# EAGLE board TSA_APS (EAGLE 9.7.0)
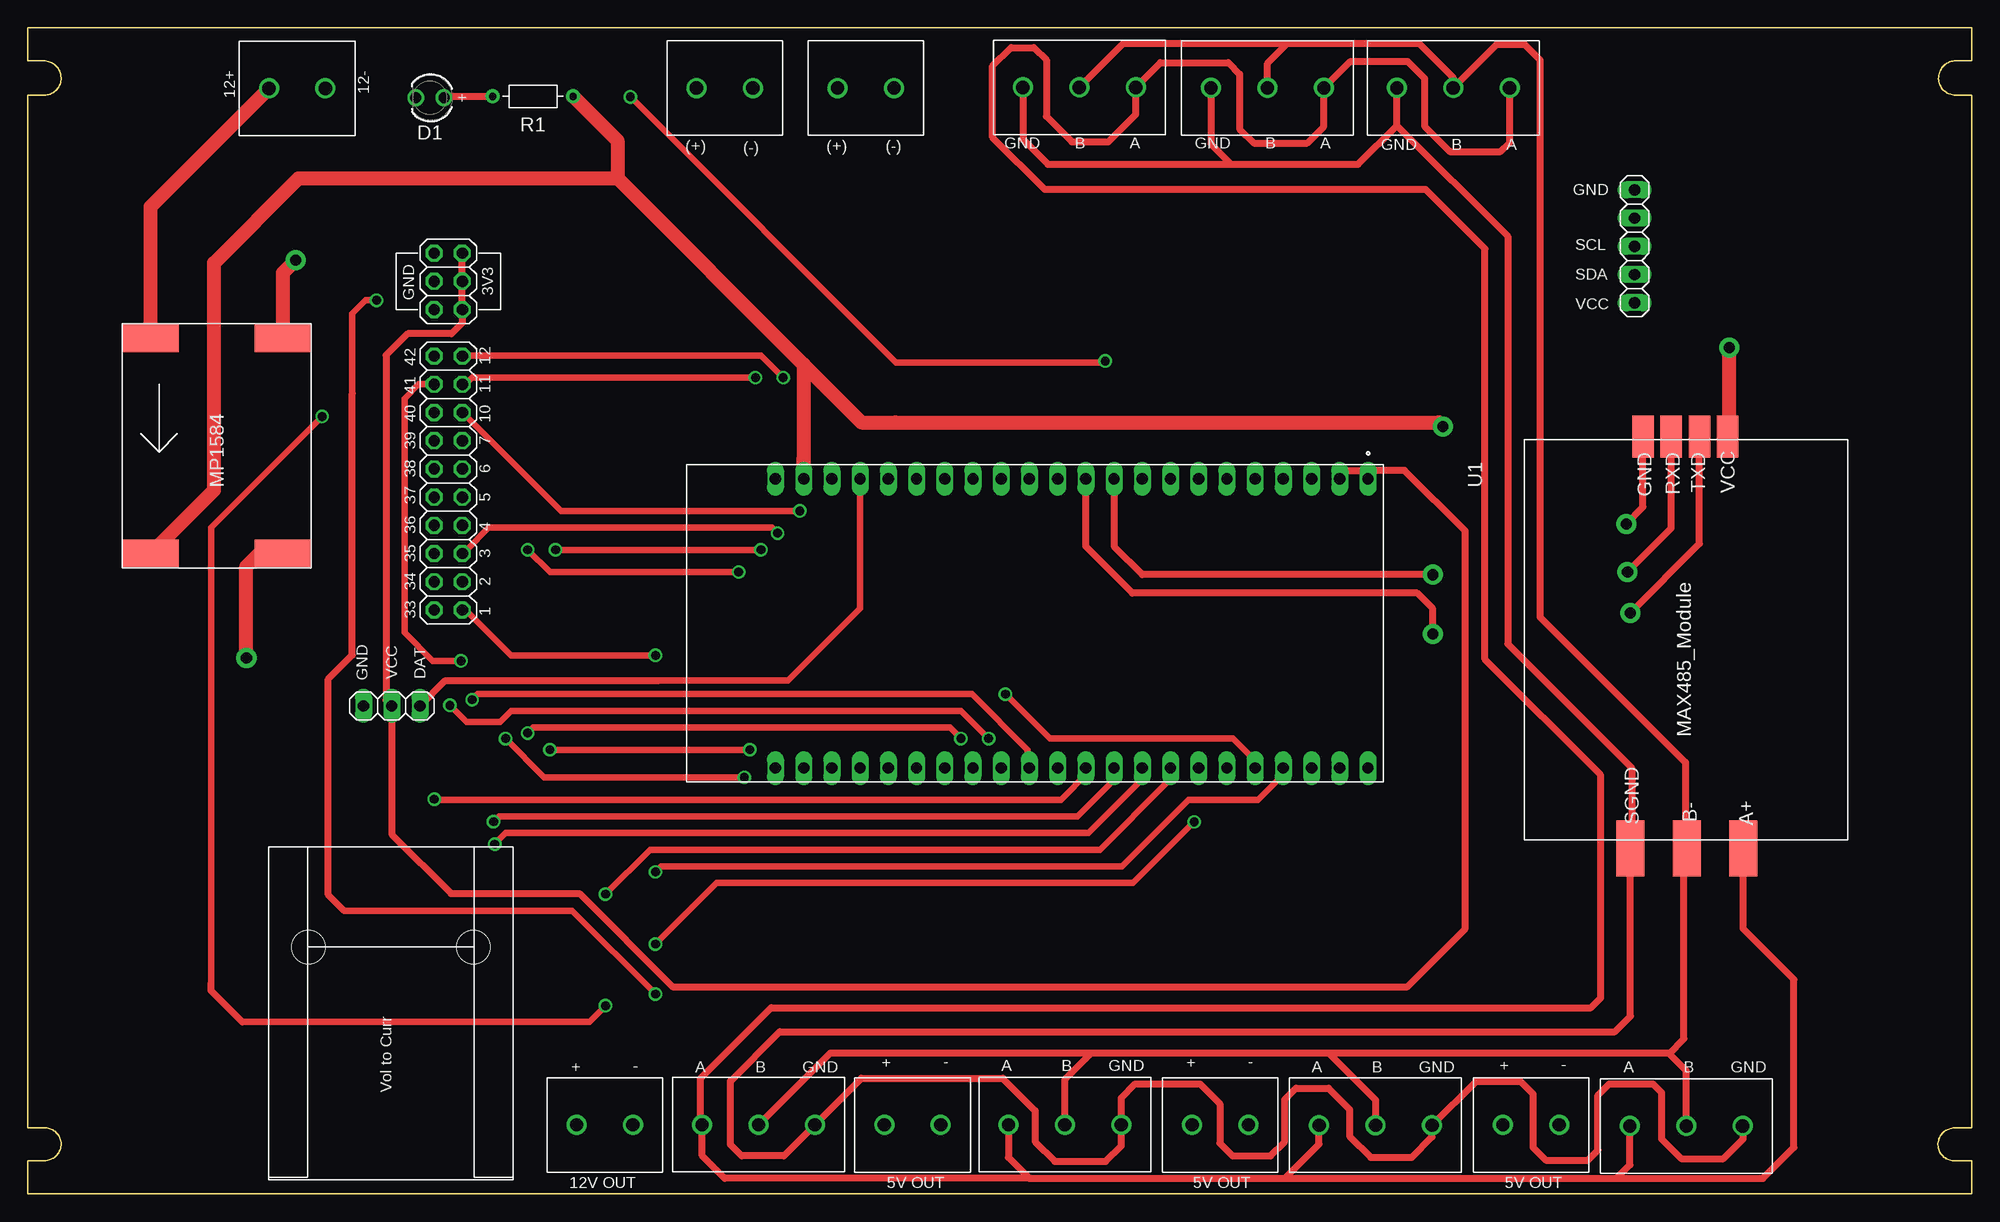
[diagram p0: board, top side]
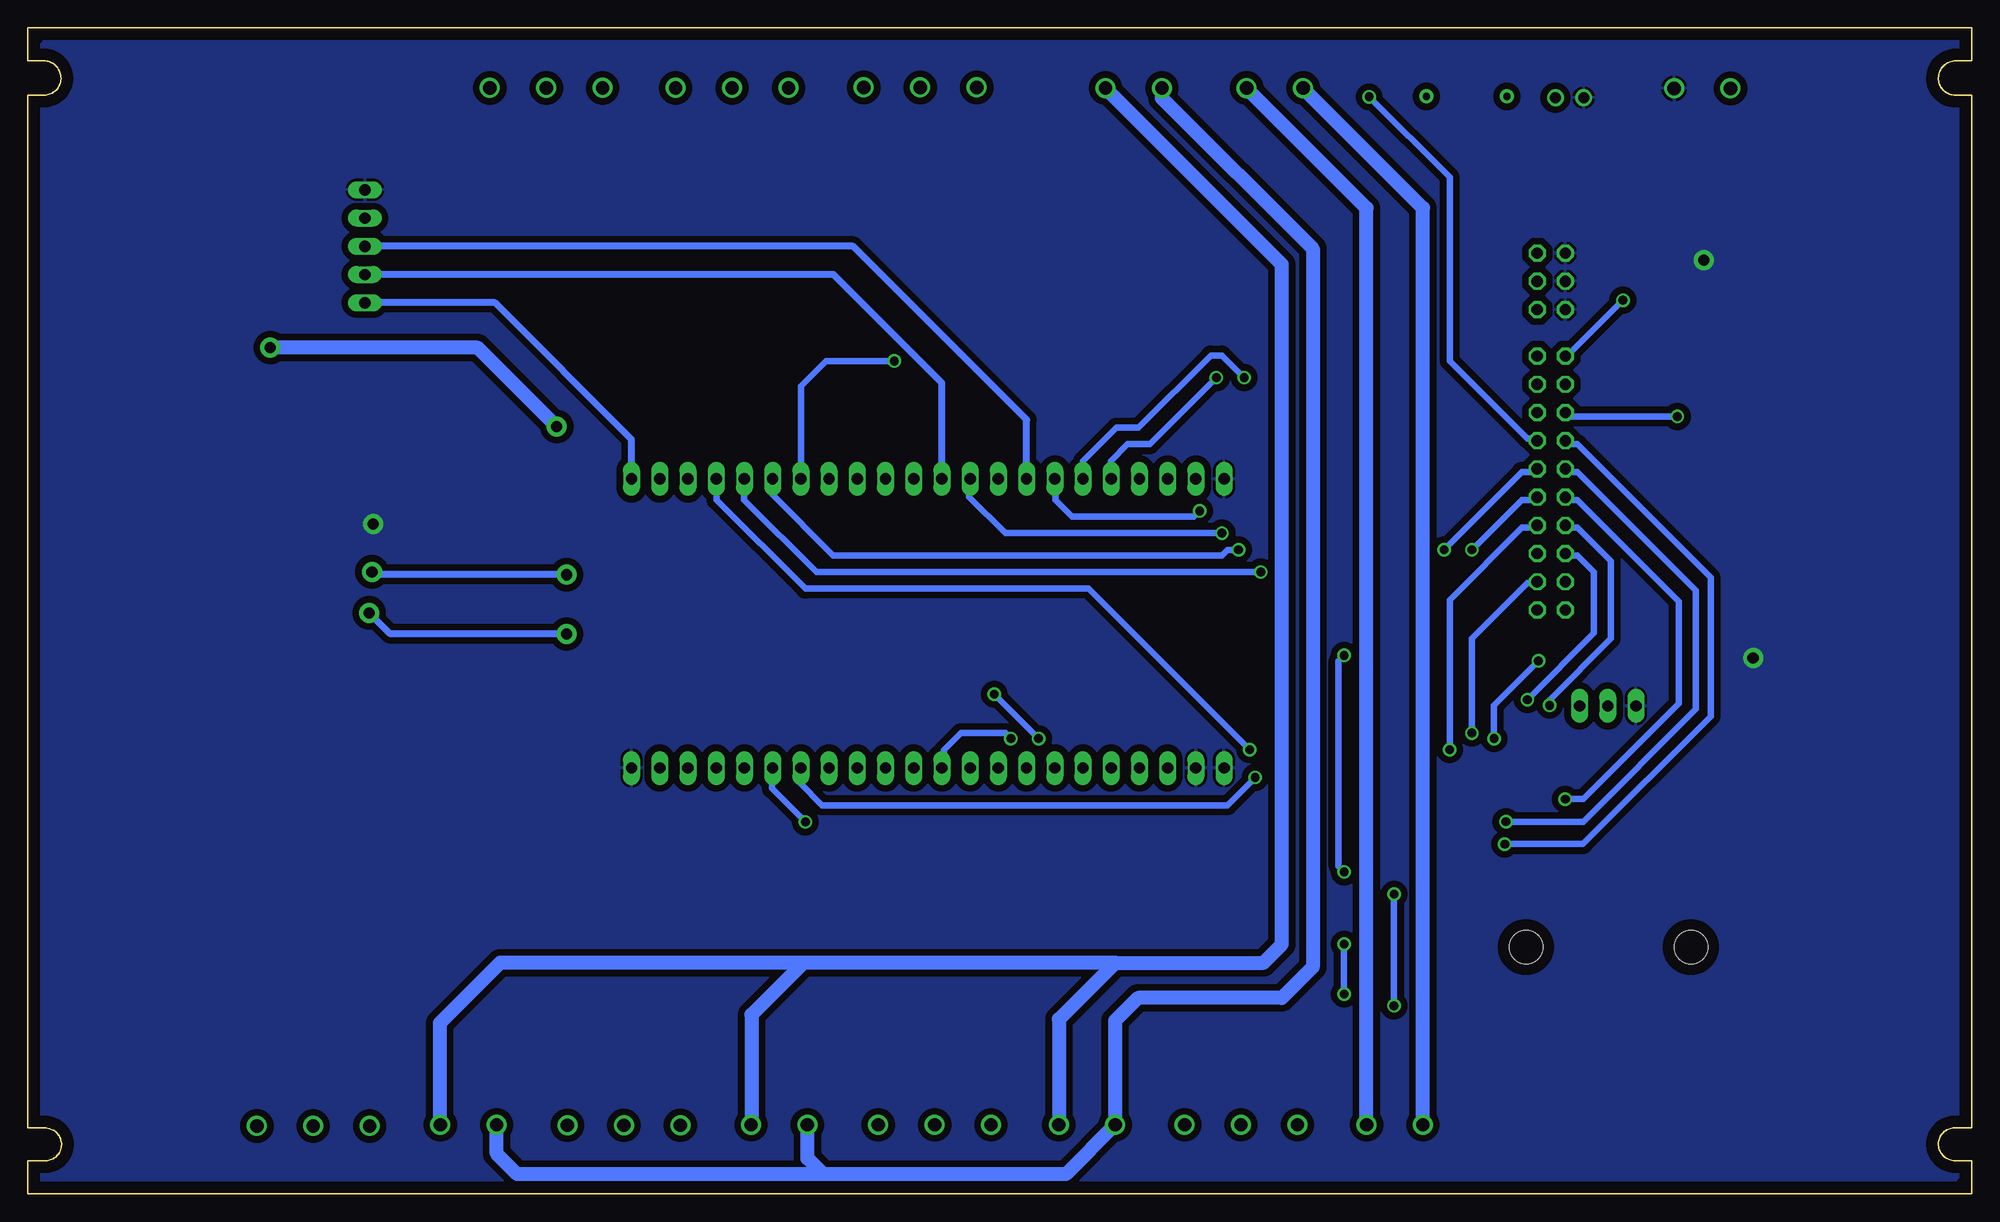
[diagram p1: board, bottom side, seen from below]

Size 175 x 105 mm. Coordinates in mm from the lower left corner, seen from the top.
Outline: 1.5,3 0,3 0,0 175,0 175,3 173.4,3 arc-100 171.98,4.71 arc-80 173.46,5.95 175,5.95 175,98.93 173.53,98.93 arc-100 172.03,100.73 arc-80 173.58,102.03 175,102.03 175,105 0,105 0,102.03 1.43,102.03 arc-100 2.98,100.19 arc-80 1.48,98.93 0,98.93 0,5.95 1.55,5.95 arc-100 2.98,4.24 arc-80 1.5,3
Copper layers (1*16): Top 0.035mm / dielectric 1.5mm / Bottom 0.035mm
Design rules "Fusion Electronics Design Rules": minimum track width 0.6mm, minimum drill 0.8mm, track to track 0.6mm, track to pad 0.6mm, pad to pad 0.6mm, via to via 0.6mm, smd to smd 0.6mm, copper to edge 40mil, drill to drill 6mil, minimum pad ring 10mil, minimum via ring 8mil, stop-mask expansion 4mil, vias tented up to drill 9999mil, thermal gap 10mil
Holes 3 mm at 25.27,22.23 40.13,22.23

## Footprints (pad centres in the part's own frame; a part is rotated, then mirrored left to right if it is on the bottom)
TERMBLK_508-3N = drill 1.2: 1 0,0; 2 5.08,0; 3 10.16,0
WL-TMRW_3MM = drill 1: 1 1.27,0; 2 -1.27,0
TERMBLK_508-2N = drill 1.2: 1 0,0; 2 5.08,0
2X03 = drill 1.016 octagon: 1 -2.54,-1.27; 2 -2.54,1.27; 3 0,-1.27; 4 0,1.27; 5 2.54,-1.27; 6 2.54,1.27
2X10 = drill 1.016 octagon: 1 -11.43,-1.27; 2 -11.43,1.27; 3 -8.89,-1.27; 4 -8.89,1.27; 5 -6.35,-1.27; 6 -6.35,1.27; 7 -3.81,-1.27; 8 -3.81,1.27; 9 -1.27,-1.27; 10 -1.27,1.27; 11 1.27,-1.27; 12 1.27,1.27; 13 3.81,-1.27; 14 3.81,1.27; 15 6.35,-1.27; 16 6.35,1.27; 17 8.89,-1.27; 18 8.89,1.27; 19 11.43,-1.27; 20 11.43,1.27
1X05 = drill 1.016 long: 1 -5.08,0; 2 -2.54,0; 3 0,0; 4 2.54,0; 5 5.08,0
RESAD724W46L381D178B = drill 0.66 pad 1.26: 1 -3.62,0; 2 3.62,0
XCVR_ESP32-S3-DEVKITC-1-N8R2 = drill 1.02 long: J1_1 -11.43,29.97; J1_2 -11.43,27.43; J1_3 -11.43,24.89; J1_4 -11.43,22.35; J1_5 -11.43,19.81; J1_6 -11.43,17.27; J1_7 -11.43,14.73; J1_8 -11.43,12.19; J1_9 -11.43,9.65; J1_10 -11.43,7.11; J1_11 -11.43,4.57; J1_12 -11.43,2.03; J1_13 -11.43,-0.51; J1_14 -11.43,-3.05; J1_15 -11.43,-5.59; J1_16 -11.43,-8.13; J1_17 -11.43,-10.67; J1_18 -11.43,-13.21; J1_19 -11.43,-15.75; J1_20 -11.43,-18.29; J1_21 -11.43,-20.83; J1_22 -11.43,-23.37; J3_1 14.605,29.97; J3_2 14.605,27.43; J3_3 14.605,24.89; J3_4 14.605,22.35; J3_5 14.605,19.81; J3_6 14.605,17.27; J3_7 14.605,14.73; J3_8 14.605,12.19; J3_9 14.605,9.65; J3_10 14.605,7.11; J3_11 14.605,4.57; J3_12 14.605,2.03; J3_13 14.605,-0.51; J3_14 14.605,-3.05; J3_15 14.605,-5.59; J3_16 14.605,-8.13; J3_17 14.605,-10.67; J3_18 14.605,-13.21; J3_19 14.605,-15.75; J3_20 14.605,-18.29; J3_21 14.605,-20.83; J3_22 14.605,-23.37
MP1584 = smd 2.54 x 5.08: IN+ 1.27,2.54; IN- 1.27,14.478; OUT+ 20.701,2.54; OUT- 20.701,14.478
MAX485_MODULE_SMD = smd 5.08 x 2.54: A+ 36.83,19.685; B- 36.83,14.605; SGND 36.83,9.525 | smd 3.81 x 1.93: GND -0.254,10.668; RXD -0.254,13.208; TXD -0.254,15.748; VCC -0.254,18.288
1X03 = drill 1.016 long: 1 -2.54,0; 2 0,0; 3 2.54,0

## Placement (x,y rotation side)
7IN1-SENSOR  2828XX-3282837-3  [TERMBLK_508-3N]  116.25,6.19 0 top
D1  151034BS03000  [WL-TMRW_3MM]  36.2,98.7 180 top
HMI  2828XX-3282837-3  [TERMBLK_508-3N]  116.68,99.59 180 top
J1  PRW_12VDC  [TERMBLK_508-2N]  21.71,99.55 0 top
J9  5V-IN-Source  [TERMBLK_508-2N]  72.9,99.57 0 top
J10  12V-IN-Source  [TERMBLK_508-2N]  60.2,99.57 0 top
JP1  PWR-add  [2X03]  37.85,82.17 90 top
JP2  PIN-ADD  [2X10]  37.85,64.01 90 top
JP5  MINI_DS3231  [1X05]  144.65,85.32 90 top
PWR-7IN1-SENSOR1  2828XX-2282837-2  [TERMBLK_508-2N]  137.87,6.22 180 top
PWR-PRESSURE-SENSOR  2828XX-2282837-2  [TERMBLK_508-2N]  54.48,6.22 180 top
PWR-ULTRASONIC1  2828XX-2282837-2  [TERMBLK_508-2N]  82.19,6.22 180 top
PWR-ULTRASONIC2  2828XX-2282837-2  [TERMBLK_508-2N]  109.89,6.22 180 top
R1  [RESAD724W46L381D178B]  45.47,98.83 180 top
RELAY-MODULE  Relay-Module  [TERMBLK_508-3N]  144.22,6.12 0 top
U1  ESP32-S3-DEVKITC-1-N8R2  [XCVR_ESP32-S3-DEVKITC-1-N8R2]  90.68,52.96 270 top
U$1  MP1584  [MP1584]  8.51,78.36 270 top
U$2  MAX485_MODULEMAX485_MODULE-SMD  [MAX485_MODULE_SMD]  134.75,67.94 270 top
U$7  Voltage-Current-Con  [1X03]  32.77,43.94 180 top
ULTRASONIC1  2828XX-3282837-3  [TERMBLK_508-3N]  60.7,6.23 0 top
ULTRASONIC2  2828XX-3282837-3  [TERMBLK_508-3N]  88.28,6.23 0 top
VFD  2828XX-3282837-3  [TERMBLK_508-3N]  99.74,99.63 180 top
WATER-FLOW  2828XX-3282837-3  [TERMBLK_508-3N]  133.41,99.58 180 top

## Library data of the parts
7IN1-SENSOR HMI RELAY-MODULE ULTRASONIC1 ULTRASONIC2 VFD WATER-FLOW = Connector; CATEGORY: Connectors; DATASHEET: https://www.te.com/usa-en/product-282837-3.datasheet.pdf; DESCRIPTION: 3 Position Wire to Board Terminal Block Horizontal with Board 0.200" (5.08mm) Through Hole; MANUFACTURER: TE Connectivity AMP Connectors; MPN: 282837-3; OPERATING_TEMPERATURE: -40°C ~ 105°C; PACKAGE_SIZE: NA; PACKAGE_TYPE: Through Hole; PART_STATUS: Active; PITCH: 0.200" (5.08mm); ROHS: Compliant; SERIES: Buchanan; SUBCATEGORY: Terminal Block; TYPE: Screw Terminal - Rising Cage Clamp Side Wire Entry
D1 = Wurth_LEDs_WL-TMRW; CHIP-TECHNOLOGY: InGaN; DATASHEET-URL: https://www.we-online.com/redexpert/spec/151034BS03000?ae; DOMINANT-WAVELENGTH: 470nm; EMITTING-COLOR: Blue; FORWARD-VOLTAGE: 2.8V; LUMINOUS-INTENSITY: 2400mcd; PART-NUMBER: 151034BS03000; PEAK-WAVELENGTH: 465nm; VIEWING-ANGLE: 30°
J1 J9 J10 PWR-7IN1-SENSOR1 PWR-PRESSURE-SENSOR PWR-ULTRASONIC1 PWR-ULTRASONIC2 = Connector; CATEGORY: Connectors; DATASHEET: https://www.te.com/usa-en/product-282837-2.datasheet.pdf; DESCRIPTION: 2 Position Wire to Board Terminal Block Horizontal with Board 0.200" (5.08mm) Through Hole; MANUFACTURER: TE Connectivity AMP Connectors; MPN: 282837-2; OPERATING_TEMPERATURE: -40°C ~ 105°C; PACKAGE_SIZE: NA; PACKAGE_TYPE: Through Hole; PART_STATUS: Active; PITCH: 0.200" (5.08mm); ROHS: Compliant; SERIES: Buchanan; SUBCATEGORY: Terminal Blocks; TYPE: Screw Terminal - Rising Cage Clamp Side Wire Entry
JP1 = Connector; CATEGORY: Connectors; DESCRIPTION: Header-Straight-2x3 Position; PACKAGE_TYPE: Through Hole; PITCH: 0.100" (2.54mm); SUBCATEGORY: Headers; TYPE: Male Pins
JP2 = Connector; CATEGORY: Connectors; DESCRIPTION: Header-Straight-2x10 Position; PACKAGE_TYPE: Through Hole; PITCH: 0.100" (2.54mm); SUBCATEGORY: Headers; TYPE: Male Pins
JP5 = Connector; CATEGORY: Connectors; DESCRIPTION: Header-Straight-5 Position; PACKAGE_TYPE: Through Hole; PITCH: 0.100" (2.54mm); SUBCATEGORY: Headers; TYPE: Male Pins
R1 = Resistor; CATEGORY: Resistors; DESCRIPTION: Axial Resistor 7.24 mm pitch 3.81 mm body length 1.78 mm body diameter; PACKAGE_SIZE: Axial; PACKAGE_TYPE: Through Hole
U1 = ESP32-S3-DEVKITC-1-N8R2; AVAILABILITY: In Stock; CHECK_PRICES: https://www.snapeda.com/parts/ESP32-S3-DEVKITC-1-N8R2/Espressif+Systems/view-part/?ref=eda; DESCRIPTION: WiFi Development Tools - 802.11 ESP32-S3 general-purpose development board, embeds ESP32-S3-WROOM-1-N8R2, with pin header; MF: Espressif Systems; MP: ESP32-S3-DEVKITC-1-N8R2; PACKAGE: None; PRICE: None; SNAPEDA_LINK: https://www.snapeda.com/parts/ESP32-S3-DEVKITC-1-N8R2/Espressif+Systems/view-part/?ref=snap
U$1 = MP1584
U$2 = MAX485
U$7 = Tinkercad

## Nets
3V3: JP1.1 JP1.3 JP1.5 JP5.1 U1.J1_1 U1.J1_2 U$7.2
5V: R1.1 U1.J1_21 U$1.OUT+ U$2.VCC
5V-SENSOR-SOURCE: J9.1 PWR-7IN1-SENSOR1.2 PWR-ULTRASONIC1.2 PWR-ULTRASONIC2.2
5V-SGND: J9.2 PWR-7IN1-SENSOR1.1 PWR-ULTRASONIC1.1 PWR-ULTRASONIC2.1
12V-SENSOR-SOURCE: J10.1 PWR-PRESSURE-SENSOR.2
12V-SGND: J10.2 PWR-PRESSURE-SENSOR.1
A: U1.J1_19 U$7.1
A+: 7IN1-SENSOR.1 HMI.1 RELAY-MODULE.1 U$2.A+ ULTRASONIC1.1 ULTRASONIC2.1 VFD.1 WATER-FLOW.1
B-: 7IN1-SENSOR.2 HMI.2 RELAY-MODULE.2 U$2.B- ULTRASONIC1.2 ULTRASONIC2.2 VFD.2 WATER-FLOW.2
GND: D1.1 J1.2 JP1.2 JP1.4 JP1.6 JP5.5 U1.J1_22 U1.J3_1 U1.J3_21 U1.J3_22 U$1.IN- U$1.OUT- U$2.GND U$7.3
IO0: U1.J3_14
IO1: JP2.1 U1.J3_4
IO2: JP2.3 U1.J3_5
IO3: JP2.5 U1.J1_13
IO4: JP2.7 U1.J1_4
IO5: JP2.9 U1.J1_5
IO6: JP2.11 U1.J1_6
IO7: JP2.13 U1.J1_7
IO10: JP2.15 U1.J1_16
IO11: JP2.17 U1.J1_17
IO12: JP2.19 U1.J1_18
IO14: U1.J1_20
IO15: U1.J1_8
IO16: U1.J1_9
IO19: U1.J3_20
IO20: U1.J3_19
IO21: U1.J3_18
IO33: JP2.2
IO34: JP2.4
IO35: JP2.6 U1.J3_13
IO36: JP2.8 U1.J3_12
IO37: JP2.10 U1.J3_11
IO38: JP2.12 U1.J3_10
IO39: JP2.14 U1.J3_9
IO40: JP2.16 U1.J3_8
IO41: JP2.18 U1.J3_7
IO42: JP2.20 U1.J3_6
IO45: U1.J3_15
IO46: U1.J1_14
IO47: U1.J3_17
IO48: U1.J3_16
N$1: J1.1 U$1.IN+
N$2: D1.2 R1.2
RX: U1.J1_10 U$2.RXD
SCL: JP5.3 U1.J1_15
SDA: JP5.2 U1.J1_12
SGND: 7IN1-SENSOR.3 HMI.3 RELAY-MODULE.3 U$2.SGND ULTRASONIC1.3 ULTRASONIC2.3 VFD.3 WATER-FLOW.3
TX: U1.J1_11 U$2.TXD

## Tracks (layer width: path | path; a pad name or v marks a point on that pad's centre or on a via)
3V3
  Top 0.61: JP1.5 JP1.3 JP1.1 39.12,78.42 38.16,77.45 34.2,77.45 32.26,75.51 32.26,44.45 U$7.2 32.77,32.38 38.1,27.05 49.66,27.05 58.04,18.67 124.21,18.67 129.41,23.88 129.41,59.69 123.95,65.15 120.65,65.15 | U1.J1_1 120.65,65.15 | U1.J1_2 118.11,65.15 120.65,65.15
  Bottom 0.61: U1.J1_1 120.65,67.94 132.95,80.24 JP5.1
5V  (via drill 1 pad 1.8)
  Top 0.6: 153,68.5 U$2.VCC
  Top 1.27: U$1.OUT+ 16.76,63.37 16.76,83.82 24.38,91.44 53.09,91.44 | 53.09,91.44 69.85,74.68 | 69.85,74.68 U1.J1_21 69.85,66.29 | R1.1 53.09,94.83 53.09,91.44 | v127.38,69.09 127,69.47 78.11,69.47 75.06,69.47 69.85,74.68 | U$2.VCC 153.16,68.33 v153.16,76.2
  Bottom 1.27: v127.38,69.09 134.49,76.2 v153.16,76.2
5V-SENSOR-SOURCE
  Bottom 1.27: J9.1 72.9,98.68 59.31,85.09 59.31,20.45 62.1,17.65 75.06,17.65 77.11,15.6 PWR-ULTRASONIC1.2 81.55,1.78 103.38,1.78 | 103.38,1.78 104.81,3.21 PWR-ULTRASONIC2.2 | 103.38,1.78 130.94,1.78 132.79,3.63 PWR-7IN1-SENSOR1.2
5V-SGND
  Bottom 1.27: 77.09,20.83 63.75,20.83 62.1,22.48 62.1,83.69 J9.2 | 77.09,20.83 82.19,15.73 PWR-ULTRASONIC1.1 | 77.09,20.83 105.16,20.83 | 105.16,20.83 109.86,16.13 109.86,6.26 PWR-ULTRASONIC2.1 | 105.16,20.83 132.46,20.83 137.92,15.37 137.92,6.28 PWR-7IN1-SENSOR1.1
12V-SENSOR-SOURCE
  Bottom 1.27: PWR-PRESSURE-SENSOR.2 49.4,88.77 J10.1
12V-SGND
  Bottom 1.27: PWR-PRESSURE-SENSOR.1 54.48,88.77 J10.2
A
  Top 0.6: 56.77,46.23 68.45,46.23 74.93,52.7 U1.J1_19
  Top 0.61: U$7.1 37.59,46.23 56.77,46.23
A+
  Top 0.61: WATER-FLOW.1 133.41,94.67 132.59,93.85 128.02,93.85 125.73,96.14 125.73,100.46 124.21,101.98 119.07,101.98 HMI.1 116.68,96.11 115.19,94.61 110.36,94.61 109.09,95.89 109.09,100.84 108.08,101.85 101.97,101.85 VFD.1 99.74,97.2 97.28,94.74 93.98,94.74 91.69,97.03 91.69,102.11 90.58,103.22 88.52,103.22 86.87,101.57 86.87,95.12 91.57,90.42 125.86,90.42 131.19,85.09 131.19,48.13 141.6,37.72 141.6,17.65 140.72,16.76 66.93,16.76 60.58,10.41 60.58,6.36 ULTRASONIC1.1 60.7,3.44 62.75,1.4 90.17,1.4 | 90.17,1.4 113.16,1.4 | 113.16,1.4 116.25,4.49 7IN1-SENSOR.1 | ULTRASONIC2.1 88.28,3.29 90.17,1.4 | 113.16,1.4 143,1.4 | 143,1.4 144.22,2.62 RELAY-MODULE.1 | 143,1.4 156.21,1.4 159,4.19 159,19.3 154.43,23.88 U$2.A+ | U$2.A+ 154.37,31.18 154.37,31.94 154.69,31.62 154.43,31.37 U$2.A+
B-
  Top 0.6: 149.22,30.86 149.5,31 U$2.B-
  Top 0.61: VFD.2 98.64,103.6 113.41,103.6 | 113.41,103.6 125.22,103.6 128.33,100.5 WATER-FLOW.2 132.25,103.5 134.75,103.5 136.14,102.11 136.14,51.94 149.22,38.86 149.22,30.86 149.1,30.73 | HMI.2 111.6,101.79 113.41,103.6 | ULTRASONIC1.2 72.25,12.7 95.76,12.7 | 95.76,12.7 117.09,12.7 | 117.09,12.7 121.33,8.46 7IN1-SENSOR.2 | ULTRASONIC2.2 93.36,10.3 95.76,12.7 | 117.09,12.7 147.7,12.7 147.76,12.64 | RELAY-MODULE.2 149.31,11.1 147.76,12.64 | 147.76,12.64 149.1,13.97 149.1,30.73 | 149.1,30.73 149.1,32.13
GND  (via drill 1 pad 1.8)
  Top 0.61: v143.89,60.33 145.41,61.85 U$2.GND
  Top 1.27: v19.68,48.26 19.68,56.52 20.83,57.66 U$1.OUT- | U$1.IN- 22.99,82.93 v24.13,84.07
  pour Bottom: 2.57,0.08 174.93,0.08 174.93,102.46 172.43,104.95 0.08,104.95 0.08,2.57
IO1  (via drill 0.8)
  Top 0.6: v56.5,48.5 43.5,48.5 39.5,52.5 JP2.1 | v56.5,29 57,29.5 98.5,29.5 104.5,35.5 110.75,35.5 113.03,37.77 U1.J3_4
  Bottom 0.6: v56.5,29 57,29.5 57,48 v56.5,48.5
IO2  (via drill 0.8)
  Top 0.6: v84,41 83,42 45.5,42 v45,41.5 | U1.J3_5 110,38.5 110,39.5 108.5,41 92,41 v88,45
  Bottom 0.6: v45,41.5 45,50 40,55 39.5,55 JP2.3 | v84,41 v88,45
IO3  (via drill 0.8)
  Top 0.6: JP2.5 39.5,58 41.5,60 67,60 v67.5,59.5
  Bottom 0.6: v67.5,59.5 87,59.5 90.25,62.75 90.25,64.3 U1.J1_13
IO4  (via drill 0.8)
  Top 0.6: v47,40 v65,40
  Bottom 0.6: v47,40 47,53.5 40.5,60 39.5,60 JP2.7 | v65,40 79.5,54.5 105,54.5 113,62.5 113,64 U1.J1_4
IO5  (via drill 0.8)
  Top 0.6: v64,56 47,56 v45,58
  Bottom 0.6: v45,58 40.5,62.5 39.5,62.5 JP2.9 | v64,56 104,56 110.5,62.5 110.5,64 U1.J1_5
IO6  (via drill 0.8)
  Top 0.6: v47.5,58 v66,58
  Bottom 0.6: v47.5,58 40.5,65 39.5,65 JP2.11 | v66,58 67,58 67.5,57.5 102.5,57.5 108,63 108,64 U1.J1_6
IO7  (via drill 0.8)
  Top 0.6: v97,75 96.87,74.87 78.15,74.87 v54.25,98.78
  Bottom 0.6: JP2.13 39.5,68 40,68 47,75 47,91.53 v54.25,98.78 | U1.J1_7 105.38,64.4 105.38,72.74 103.12,75 v97,75
IO10  (via drill 0.8)
  Top 0.6: v69.5,61.5 48,61.5 39.5,70 JP2.15
  Bottom 0.6: v69.5,61.5 70,61 81,61 82.5,62.5 82.5,64 U1.J1_16
IO11  (via drill 0.8)
  Top 0.6: JP2.17 39.5,73 40,73.5 v65.5,73.5
  Bottom 0.6: U1.J1_17 80,64.5 80,66 77,69 75,69 68.5,75.5 67.5,75.5 v65.5,73.5
IO12  (via drill 0.8)
  Top 0.6: v68,73.5 66,75.5 39.5,75.5 JP2.19
  Bottom 0.6: U1.J1_18 77.5,64.5 77.5,66 76,67.5 74,67.5 v68,73.5
IO35  (via drill 0.8)
  Top 0.6: U1.J3_13 90,38.5 90,40 85,45 40.5,45 v40,44.5
  Bottom 0.6: v40,44.5 34,50.5 34,56 35.5,57.5 36.5,57.5 JP2.6
IO36  (via drill 0.8)
  Top 0.6: v86.5,41 84,43.5 43.5,43.5 42.5,42.5 39.5,42.5 v38,44
  Bottom 0.6: v38,44 38,44.5 32.5,50 32.5,57 35.5,60 36.5,60 JP2.8 | U1.J3_12 92.5,38.5 92.5,40 91,41.5 87,41.5 v86.5,41
IO37  (via drill 0.8)
  Top 0.6: v36.59,35.55 36.64,35.5 93,35.5 95.5,38 U1.J3_11
  Bottom 0.6: v36.59,35.55 34.95,35.55 26.35,44.15 26.35,53.35 35.5,62.5 36.5,62.5 JP2.10
IO38  (via drill 0.8)
  Top 0.6: v41.93,33.52 41.96,33.52 42.44,34 94.5,34 97.5,37 97.5,38 U1.J3_10
  Bottom 0.6: v41.93,33.52 34.98,33.52 24.85,43.65 24.85,54.35 35.5,65 36.5,65 JP2.12
IO39  (via drill 0.8)
  Top 0.6: v42.04,31.5 43.04,32.5 95.5,32.5 100,37 100,38 U1.J3_9
  Bottom 0.6: v42.04,31.5 35,31.5 23.5,43 23.5,55.5 35.5,67.5 36.5,67.5 JP2.14
IO40  (via drill 0.8)
  Top 0.6: 16.5,19 16.5,60 v26.5,70 | 19.3,15.49 50.56,15.49 v52.01,16.94 | v52,27 56,31 96.5,31 102.5,37 102.5,38 U1.J3_8
  Top 0.61: 19.3,15.49 16.5,18.3 16.5,19
  Bottom 0.6: v26.5,70 36.5,70 JP2.16 | v52,27 52,16.95 v52.01,16.94
IO41  (via drill 0.8)
  Top 0.6: v64.5,37.5 46.5,37.5 v43,41 | JP2.18 35.21,72.9 33.91,71.6 33.91,50.55 36.45,48 v39,48
  Bottom 0.6: v43,41 43,44 v39,48 | v64.5,37.5 67,35 103.5,35 105.5,37 105.5,38 U1.J3_7
IO42  (via drill 0.8)
  Top 0.6: v56.5,18 49,25.5 28.5,25.5 | v56.5,22.5 62,28 99.5,28 v105,33.5 | 29.21,72.08 29.21,79.25 30.43,80.47 v31.4,80.47
  Top 0.61: 28.5,25.5 27.05,26.95 27.05,46.35 29.21,48.51 29.21,72.08
  Bottom 0.6: v56.5,18 v56.5,22.5 | v105,33.5 108,36.5 108,38 U1.J3_6 | v31.4,80.47 36.44,75.44 JP2.20
N$1
  Top 1.27: U$1.IN+ 11.05,88.88 J1.1
N$2
  Top 0.61: D1.2 37.6,98.83 R1.2
RX  (via drill 1 pad 1.8)
  Top 0.61: v144.02,56.01 147.96,59.94 U$2.RXD | v126.49,55.75 100.33,55.75 97.79,58.29 U1.J1_10
  Bottom 0.61: v126.49,55.75 143.76,55.75 v144.02,56.01
SCL
  Bottom 0.61: U1.J1_15 85.09,69.72 100.69,85.32 JP5.3
SDA
  Bottom 0.61: U1.J1_12 92.71,73.02 102.47,82.78 JP5.2
SGND
  Top 0.61: VFD.3 89.58,94.95 91.82,92.71 108.33,92.71 | 108.33,92.71 119.76,92.71 123.25,96.2 | 123.25,96.2 133.22,86.23 133.22,49.53 144.4,38.35 144.4,31.24 U$2.SGND 144.27,16 142.88,14.61 67.69,14.61 63.25,10.16 63.25,4.45 64.26,3.43 68.06,3.43 ULTRASONIC1.3 75.05,10.41 87.76,10.41 90.68,7.49 90.68,4.7 92.46,2.92 97.03,2.92 98.44,4.33 ULTRASONIC2.3 98.44,8.65 99.69,9.91 105.54,9.91 107.31,8.13 107.31,4.57 108.46,3.43 111.89,3.43 113.16,4.7 113.16,8.51 114.17,9.53 117.09,9.53 119,7.62 119,5.21 120.9,3.3 124.59,3.3 126.41,5.13 7IN1-SENSOR.3 130.39,10.16 134.37,10.16 135.51,9.02 135.51,4.19 136.65,3.05 140.46,3.05 141.35,3.94 141.35,8.89 142.37,9.91 146.3,9.91 147.07,9.14 147.07,4.95 148.84,3.17 152.65,3.17 154.43,4.95 154.43,6.08 RELAY-MODULE.3 | 123.25,96.2 WATER-FLOW.3 | HMI.3 106.52,94.52 108.33,92.71
TX  (via drill 1 pad 1.8)
  Top 0.61: v144.27,52.32 150.5,58.55 U$2.TXD | v126.49,50.42 126.49,52.7 125.09,54.1 99.44,54.1 95.25,58.29 U1.J1_11
  Bottom 0.61: v126.49,50.42 142.37,50.42 v144.27,52.32

## Text on the board
tPlace: (-) | (-) | GND | B | A | GND | B | A | GND | B | A | GND | SCL | GND | SDA | 3V3 | VCC | 42 | 12 | 41 | 11 | 40 | 10 | 39 | 7 | 38 | 6 | 37 | 5 | 4 | 36 | 35 | 3 | 2 | 34 | 33 | 1 | GND | VCC | DAT | + | - | A B GND | + | - | A B GND | + | - | A B GND | + | - | A B GND | Vol to Curr | 12V OUT | 5V OUT | 5V OUT | 5V OUT
tNames: 12+ | 12- | (+) | (+)